# Allegro board PCB.brd
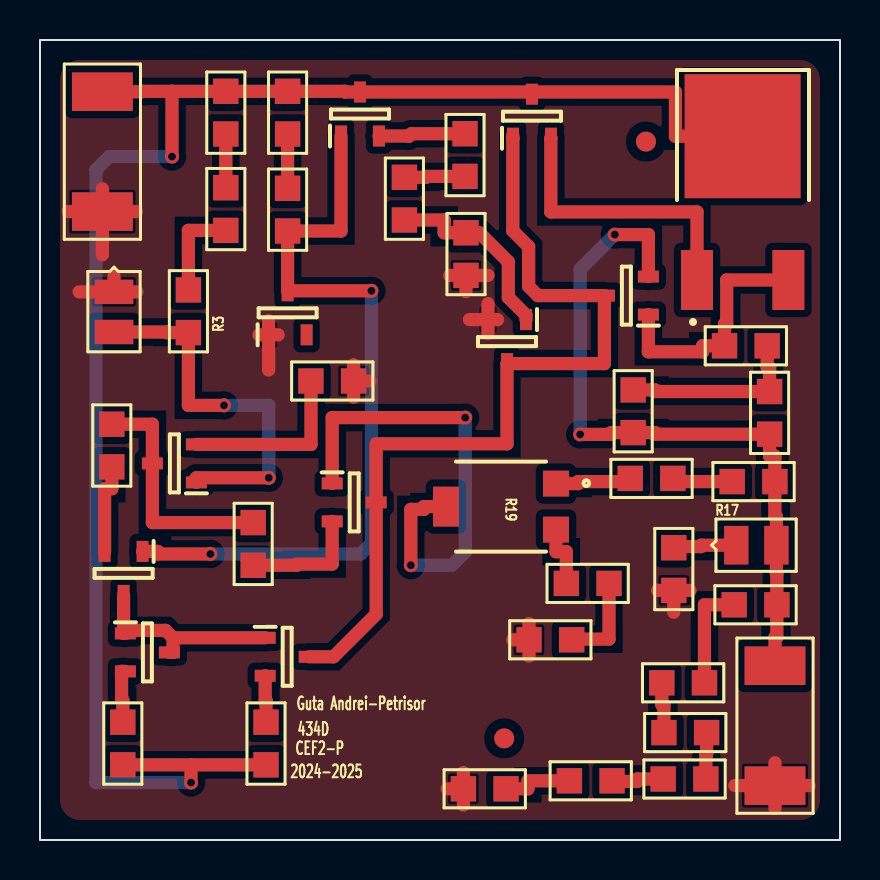
[diagram p0: board, top side]
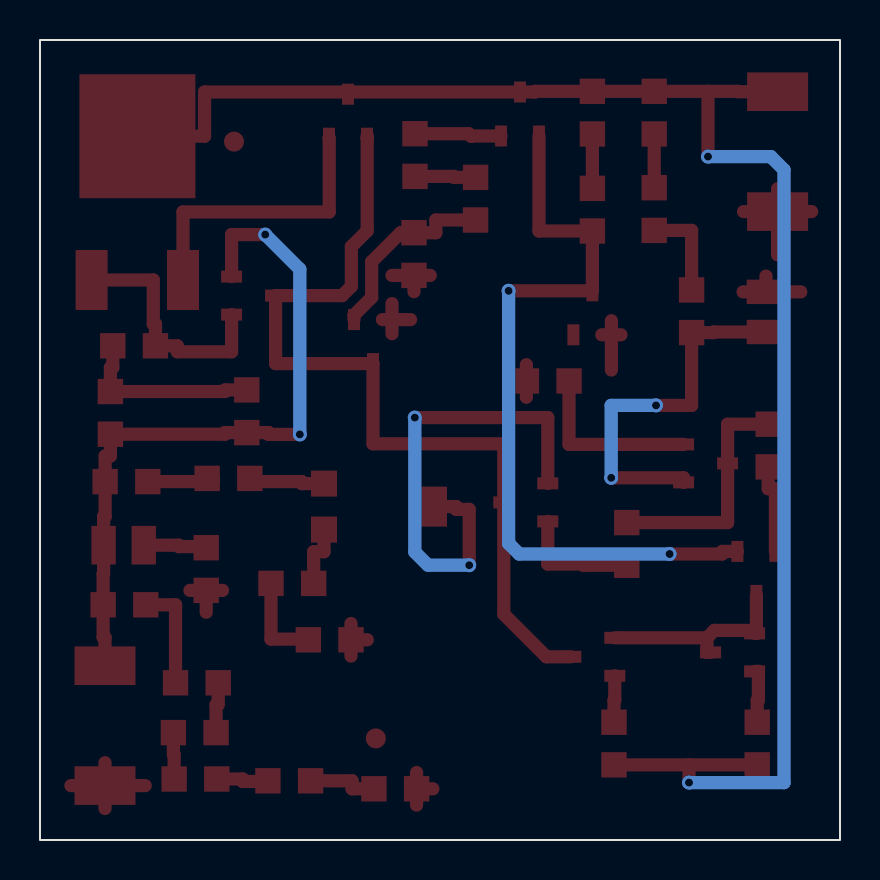
[diagram p1: board, bottom side, seen from below]

Outline 40 x 40 mm; copper layers: TOP, BOTTOM. Coordinates in mm from the lower left corner of the outline.
Outline path: rectangle 0,0 40,40

## Design rules (mm)
nets with their own width: min track width 0.66; nets 0 N81558 N81636 N81654 N81936 N81946 N82156 N82188 N82330 N82336 N82536 N82730 N82766 N89468 N89953 N97333 N98024 N98034 N98325 N101727 N115983 N121141 N817060 N817300 N817840 N818700 N820880 N822560 N824820 N825941 N826300 N925970 N987480

## Placement (name value [footprint] x y rotation side)
D1  5V,LED,LED  [SMD080521]  3.7 25.4 270 top
D2  5V,LED,LED  [SMD080521]  36.82 14.74 0 top
DZ1  BZX84C5V6  [SOT95P230X110-3N]  12.38 26.36 90 top
J1  CON2  [SMR2512]  3.12 31.42 90 top
J2  CON2  [SMR2512]  36.75 2.72 90 top
NOREF  -  [unnamed]  23.21 5.08 0 top
NOREF#2  -  [unnamed]  30.3 34.92 0 top
Q1  BC856B  [SOT95P230X110-3N]  5.37 9.38 0 top
Q2  BC846B  [SOT95P230X110-3N]  4.18 13.33 270 top
Q3  BC846B  [SOT95P230X110-3N]  15.71 16.88 0 top
Q4  BC856B  [SOT95P230X110-3N]  12.36 9.16 0 top
Q5  BC846B  [SOT95P230X110-3N]  6.72 18.83 180 top
Q6  BC846B  [SOT95P230X110-3N]  16 36.3 90 top
Q7  BC846B  [SOT95P230X110-3N]  23.35 24.92 270 top
Q8  MJD31C  [DPACK]  32.85 28 0 top
Q9  BC846B  [SOT95P230X110-3N]  24.6 36.19 90 top
Q10  BC846B  [SOT95P230X110-3N]  29.32 27.22 180 top
R1  510  [SMR0805]  9.29 35.3 90 top
R2  680  [SMR0805]  9.29 30.48 90 top
R3  820  [SMR0805]  7.42 25.37 90 top
R4  2k  [SMR0805]  12.38 35.3 90 top
R5  680  [SMR0805]  12.38 30.45 90 top
R6  510  [SMR0805]  4.14 5.89 270 top
R7  100  [SMR0805]  3.59 20.79 270 top
R8  510  [SMR0805]  11.3 5.89 270 top
R9  100  [SMR0805]  10.66 15.87 270 top
R10  2.2k  [SMR0805]  15.68 22.95 180 top
R11  910  [SMR0805]  21.25 33.18 90 top
R12  10  [SMR0805]  18.22 31 90 top
R13  100  [SMR0805]  21.3 28.23 90 top
R14  0.47  [SMR0805]  36.36 24.71 180 top
R15  1  [SMR0805]  29.66 20.37 90 top
R16  4.7  [SMR0805]  36.48 20.29 90 top
R17  910  [SMR0805]  34.61 17.92 0 top
R18  680  [SMR0805]  29.51 18.08 0 top
R19  5k  [3314G-1-102E]  23.05 16.67 270 top
R20  4.7k  [SMR0805]  28.45 12.83 180 top
R21  330  [SMR0805]  24.45 10.01 0 top
R22  2.2k  [SMR0805]  31.69 12.48 90 top
R23  100  [SMR0805]  34.71 11.76 0 top
R24  100  [SMR0805]  31.09 7.86 0 top
R25  10  [SMR0805]  33.33 5.37 180 top
R26  10  [SMR0805]  31.16 3.05 0 top
R27  150  [SMR0805]  26.47 2.96 0 top
R28  150  [SMR0805]  21.17 2.56 0 top

## Library data of the parts
D1 = LED_1
D2 = LED_2
DZ1 = BZX84C5V6_0
J1 J2 = CON2
Q1 Q4 = BC856B
Q2 Q3 Q5-Q7 Q9 Q10 = BC846B
Q8 = MJD31C_10
R1-R18 R20-R28 = RESISTOR
R19 = POT

## Footprints (pads in the part's own frame, mm; a bottom-side part is the same pattern mirrored in y, then rotated)
3314G-1-102E
  rect 1.3x1.3 smd: 1(-1.15,2.75) 3(1.15,2.75)
  rect 2x1.3 smd: 2(0,-2.75)
DPACK
  rect 1.6x3 smd: 1(0,0) 3(4.57,0)
  rect 5.8x6.2 smd: 2(2.28,7.19)
SMD080521
  rect 1.219x1.93 smd: 1(0,0) 2(-2.007,0)
SMR0805
  rect 1.27x1.27 smd: 1(0,0) 2(2.134,0)
SMR2512
  rect 1.93x3.048 smd: 1(0,0) 2(5.994,0)
SOT95P230X110-3N
  rect 1.05x0.6 smd: 1(-1.1,0.95) 2(-1.1,-0.95) 3(1.1,0)
unnamed
  round 1 smd: (0,0)

## Nets
0: D1.2 DZ1.1 J1.1 J2.1 Q7.2(E) R10.1 R13.1 R21.1 R22.1 R28.1
N81558: J1.2 Q6.3 Q8.2 Q9.3 R1.2(B) R4.2(B) R6.2(B) R8.2(B)
N81636: Q8.3(E) Q10.1 R14.2(B)
N81654: D2.1 J2.2 Q10.2(E) R15.1 R16.1 R17.2(B) R23.2(B)
N81936: Q3.3 Q4.3 Q7.3 Q9.1 Q10.3
N81946: Q1.1 Q1.3 Q2.3 Q4.1
N82156: DZ1.3(CAT) Q2.1 Q6.1 R5.1
N82188: Q6.2(E) R11.2(B)
N82330: Q2.2(E) R7.2(B)
N82336: Q3.2(E) R9.2(B)
N82536: Q5.3 R7.1 R9.1
N82730: D1.1 Q5.1 R3.1
N82766: Q5.2(E) R10.2(B)
N89468: R14.1 R15.2(B) R16.2(B)
N89953: D2.2 R22.2(B)
N97333: Q7.1 R12.1 R13.2(B)
N98024: R19.3 R20.2(B)
N98034: R20.1 R21.2(B)
N98325: Q3.1 R19.2(T)
N101727: R11.1 R12.2(B)
N115983: R17.1 R18.2(B)
N121141: Q8.1 Q9.2(E)
N817060: Q1.2(E) R6.1
N817300: Q4.2(E) R8.1
N817840: R4.1 R5.2(B)
N818700: R23.1 R24.2(B)
N820880: R24.1 R25.2(B)
N822560: R25.1 R26.2(B)
N824820: R26.1 R27.2(B)
N825941: R18.1 R19.1
N826300: R27.1 R28.2(B)
N925970: R1.1 R2.2(B)
N987480: R2.1 R3.2(B)

Pads without a net: DZ1 2

## Via types
v1: diameter 0.7, hole 0.4, TOP to BOTTOM, 10 vias

## Routing (per net, layer and track width the routed paths; a pad name or vN(x,y) marks a point on that pad's centre or on a via; arc(x,y) is an arc through that point)
0: length 35.5
  TOP w0.66: D1.2 4.84,27.41 ; D1.2 3.7,28.19 ; D1.2 1.96,27.41 ; J1.1 4.82,31.42 ; J1.1 1.42,31.42 ; J1.1 3.12,29.26 ; J1.1 3.12,32.56 ; R22.1 31.69,11.39 ; R22.1 32.5,12.48 ; R22.1 30.88,12.48 ; R13.1 22.4,28.23 ; R13.1 21.3,27.42 ; R13.1 20.49,28.23 ; 11.43,23.5 DZ1.1 ; DZ1.1 11.43,25.96 ; DZ1.1 11.91,25.26 ; DZ1.1 10.95,25.26 ; J2.1 38.45,2.72 ; J2.1 36.75,3.86 ; J2.1 36.75,1.58 ; J2.1 34.74,2.72 ; R10.1 16.49,22.95 ; R10.1 15.68,23.76 ; R10.1 15.68,22.14 ; 24.45,9.2 R21.1 ; R21.1 23.64,10.01 ; R21.1 24.45,10.82 ; Q7.2 22.88,26.02 ; Q7.2 22.4,26.82 ; Q7.2 21.47,26.02 ; Q7.2 22.4,25.32 ; 20.36,2.56 R28.1 ; R28.1 21.17,3.37 ; R28.1 21.17,1.75
N81558: length 85.2
  TOP w0.66: 6.6,37.43 R1.2 R4.2 15.24,37.43 15.24,37.4 Q6.3 24.58,37.4 ; 6.6,37.43 v1(6.6,34.17) ; 6.6,37.43 5.12,37.43 5.1,37.41 J1.2 ; v1(7.55,2.87) 7.55,3.76 ; 7.55,3.76 R8.2 ; 7.55,3.76 R6.2 ; 24.58,37.4 24.58,37.29 Q9.3 ; 24.58,37.4 31.77,37.4 31.77,35.19 Q8.2
  BOTTOM w0.66: v1(7.55,2.87) 2.8,2.87 2.8,33.51 3.46,34.17 v1(6.6,34.17)
N81636: length 12.4
  TOP w0.66: Q8.3 34.34,28 34.34,25.8 34.23,25.8 R14.2 33.13,24.71 33.13,24.41 30.42,24.41 Q10.1
N81654: length 36.2
  TOP w0.66: J2.2 36.75,10.14 36.84,10.14 R23.2 36.84,13.32 36.82,13.32 D2.1 36.82,16.16 36.74,16.16 R17.2 36.74,19.2 36.48,19.2 R16.1 30.75,20.29 30.75,20.37 R15.1 28.57,20.37 28.57,20.28 v1(27.01,20.28) ; v1(28.74,30.27) 30.42,30.27 Q10.2
  BOTTOM w0.66: v1(27.01,20.28) 27.01,28.54 v1(28.74,30.27)
N81936: length 43.4
  TOP w0.66: Q9.1 23.64,35.09 ; 23.64,35.09 23.64,35.24 ; 23.64,35.09 23.64,30.46 24.43,29.67 24.43,27.68 24.89,27.22 Q10.3 28.22,23.82 Q7.3 23.35,19.81 16.81,19.81 Q3.3 16.81,11.29 14.68,9.16 Q4.3
N81946: length 10.1
  TOP w0.66: Q1.3 6.65,9.38 6.65,10.11 ; 4.18,10.48 Q2.3 ; 4.18,10.48 4.18,10.33 Q1.1 ; 4.18,10.48 6.28,10.48 6.65,10.11 ; Q4.1 6.65,10.11
N82156: length 39
  TOP w0.66: Q6.1 15.05,30.45 R5.1 DZ1.3 v1(16.57,27.46) ; Q2.1 5.89,14.43 5.89,14.3 v1(8.52,14.3)
  BOTTOM w0.66: v1(16.57,27.46) 16.57,14.83 16.04,14.3 v1(8.52,14.3)
N82188: length 4.4
  TOP w0.66: R11.2 18.57,35.31 18.43,35.18 18.43,35.2 Q6.2
N82330: length 4.6
  TOP w0.66: R7.2 3.59,17.56 3.23,17.56 Q2.2
N82336: length 6.1
  TOP w0.66: Q3.2 14.61,13.8 12.84,13.8 12.84,13.74 R9.2
N82536: length 12
  TOP w0.66: R7.1 5.62,20.79 Q5.3 5.62,15.87 R9.1
N82730: length 18.9
  TOP w0.66: D1.1 6.33,25.4 6.33,25.37 R3.1 7.42,21.73 v1(9.2,21.73) ; v1(11.44,18.11) 7.82,18.11 Q5.1
  BOTTOM w0.66: v1(9.2,21.73) 11.44,21.73 v1(11.44,18.11)
N82766: length 8.9
  TOP w0.66: R10.2 13.55,22.95 13.55,19.78 Q5.2
N89468: length 9.3
  TOP w0.66: R15.2 30.75,22.5 30.75,22.42 R16.2 36.48,23.62 36.36,23.62 R14.1
N89953: length 3.2
  TOP w0.66: D2.2 33.06,14.74 33.06,14.67 31.96,14.67 31.96,14.61 R22.2
N97333: length 9.7
  TOP w0.66: Q7.1 24.3,26.25 23.42,27.13 23.42,28.91 21.96,30.36 R13.2 20.21,30.36 20.21,31 R12.1
N98024: length 3.2
  TOP w0.66: R19.3 25.8,14.41 26.32,14.41 R20.2
N98034: length 5.2
  TOP w0.66: R20.1 28.45,10.04 26.32,10.04 26.32,10.01 R21.2
N98325: length 24.3
  TOP w0.66: v1(21.26,21.12) 14.61,21.12 Q3.1 ; v1(18.54,13.74) 18.54,16.53 19.19,16.53 19.19,16.67 R19.2
  BOTTOM w0.66: v1(18.54,13.74) 20.6,13.74 21.26,14.4 v1(21.26,21.12)
N101727: length 3.1
  TOP w0.66: R11.1 19.31,33.18 19.31,33.13 R12.2
N115983: length 3.7
  TOP w0.66: R17.1 31.34,17.92 31.34,18.08 R18.2
N121141: length 14.4
  TOP w0.66: Q8.1 32.85,31.4 25.54,31.4 25.54,35.09 Q9.2
N817060: length 2.8
  TOP w0.66: Q1.2 4.08,8.43 4.08,6.98 4.14,6.98 R6.1
N817300: length 2.4
  TOP w0.66: R8.1 11.3,6.98 11.26,6.98 Q4.2
N817840: length 2.7
  TOP w0.66: R4.1 R5.2
N818700: length 5.4
  TOP w0.66: R23.1 33.22,11.76 R24.2
N820880: length 2.6
  TOP w0.66: R24.1 31.09,6.77 31.2,6.77 R25.2
N822560: length 2.4
  TOP w0.66: R25.1 33.33,4.28 33.29,4.28 R26.2
N824820: length 2.7
  TOP w0.66: R26.1 29.86,3.05 29.86,2.93 28.77,2.93 28.77,2.96 R27.2
N825941: length 4
  TOP w0.66: R18.1 29.21,18.08 29.21,17.92 26.91,17.92 26.91,17.82 R19.1
N826300: length 3.6
  TOP w0.66: R28.2 24.4,2.56 24.4,2.96 R27.1
N925970: length 2.7
  TOP w0.66: R1.1 R2.2
N987480: length 4.8
  TOP w0.66: R3.2 7.42,30.48 R2.1

## Copper pours and planes (outline as drawn; the poured copper is in the pictures)
0 on TOP: 1.99,1 1.29,1.29 1,1.99 1,38.01 1.29,38.71 1.99,39 38.01,39 38.71,38.71 39,38.01 39,1.99 38.71,1.29 38.01,1

## Text on the board
Ref Des/Silkscreen Top: 2024-2025 | CEF2-P | Guta Andrei-Petrisor | 434D
XSECTION_CHART: *  SURFACE - 0 MM | L1 TOP CONDUCTOR - 0.018 MM | *  DIELECTRIC - 1.6 MM | L2 BOTTOM CONDUCTOR - 0.018 MM | DESIGN CROSS SECTION CHART | ___________________________ | TOTAL THICKNESS 1.636 MM | STACKUP TABLE | Unit = Millimeter | # | 1 | 2 | NAME | TOP | BOTTOM | TYPE | SURFACE | CONDUCTOR | DIELECTRIC | MATERIAL | AIR | COPPER | FR-4 | TOTAL THICKNESS | THICKNESS | 0 | 0.018 | 1.6 | 1.636 | TOLERANCE | +0/-0 | 1-2
NCLEGEND-1-2: FIGURE | FINISHED_SIZE | 0.4 | DRILL CHART: TOP to BOTTOM | ALL UNITS ARE IN MILLIMETERS | PLATED | QTY | 10
